# Altium PCB CW6680E LQFP48 BT Boombox S10 V1.0.PcbDoc (part 1 of 2)
Units mil, origin at the board's own origin, x right, y up, seen from the top; angles counter-clockwise.
Board outline 2057.09 x 1663.06 mil, 2 copper layers (Top Layer, Bottom Layer); 63 components, 61 nets, 239 pads, 208 vias.
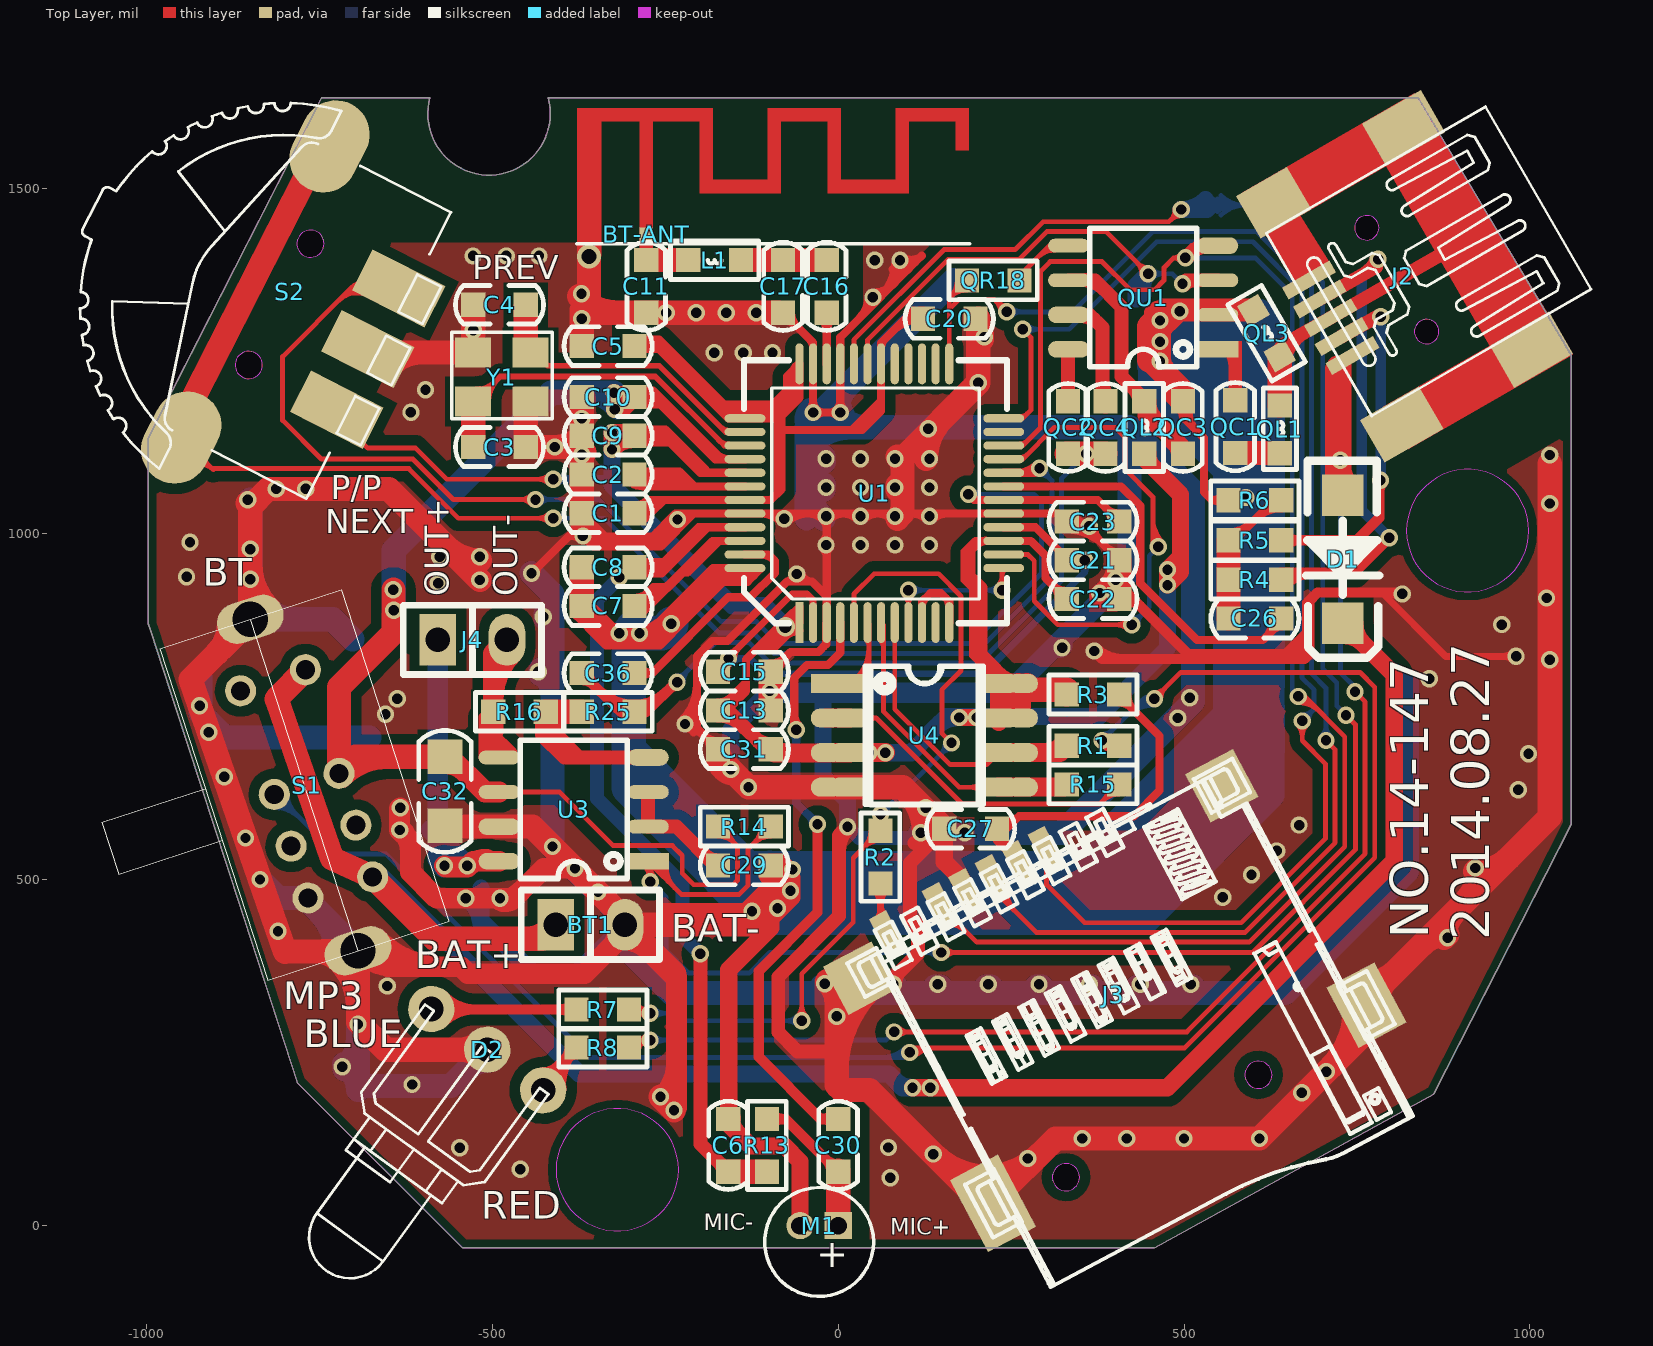
[diagram p0: Top Layer view]
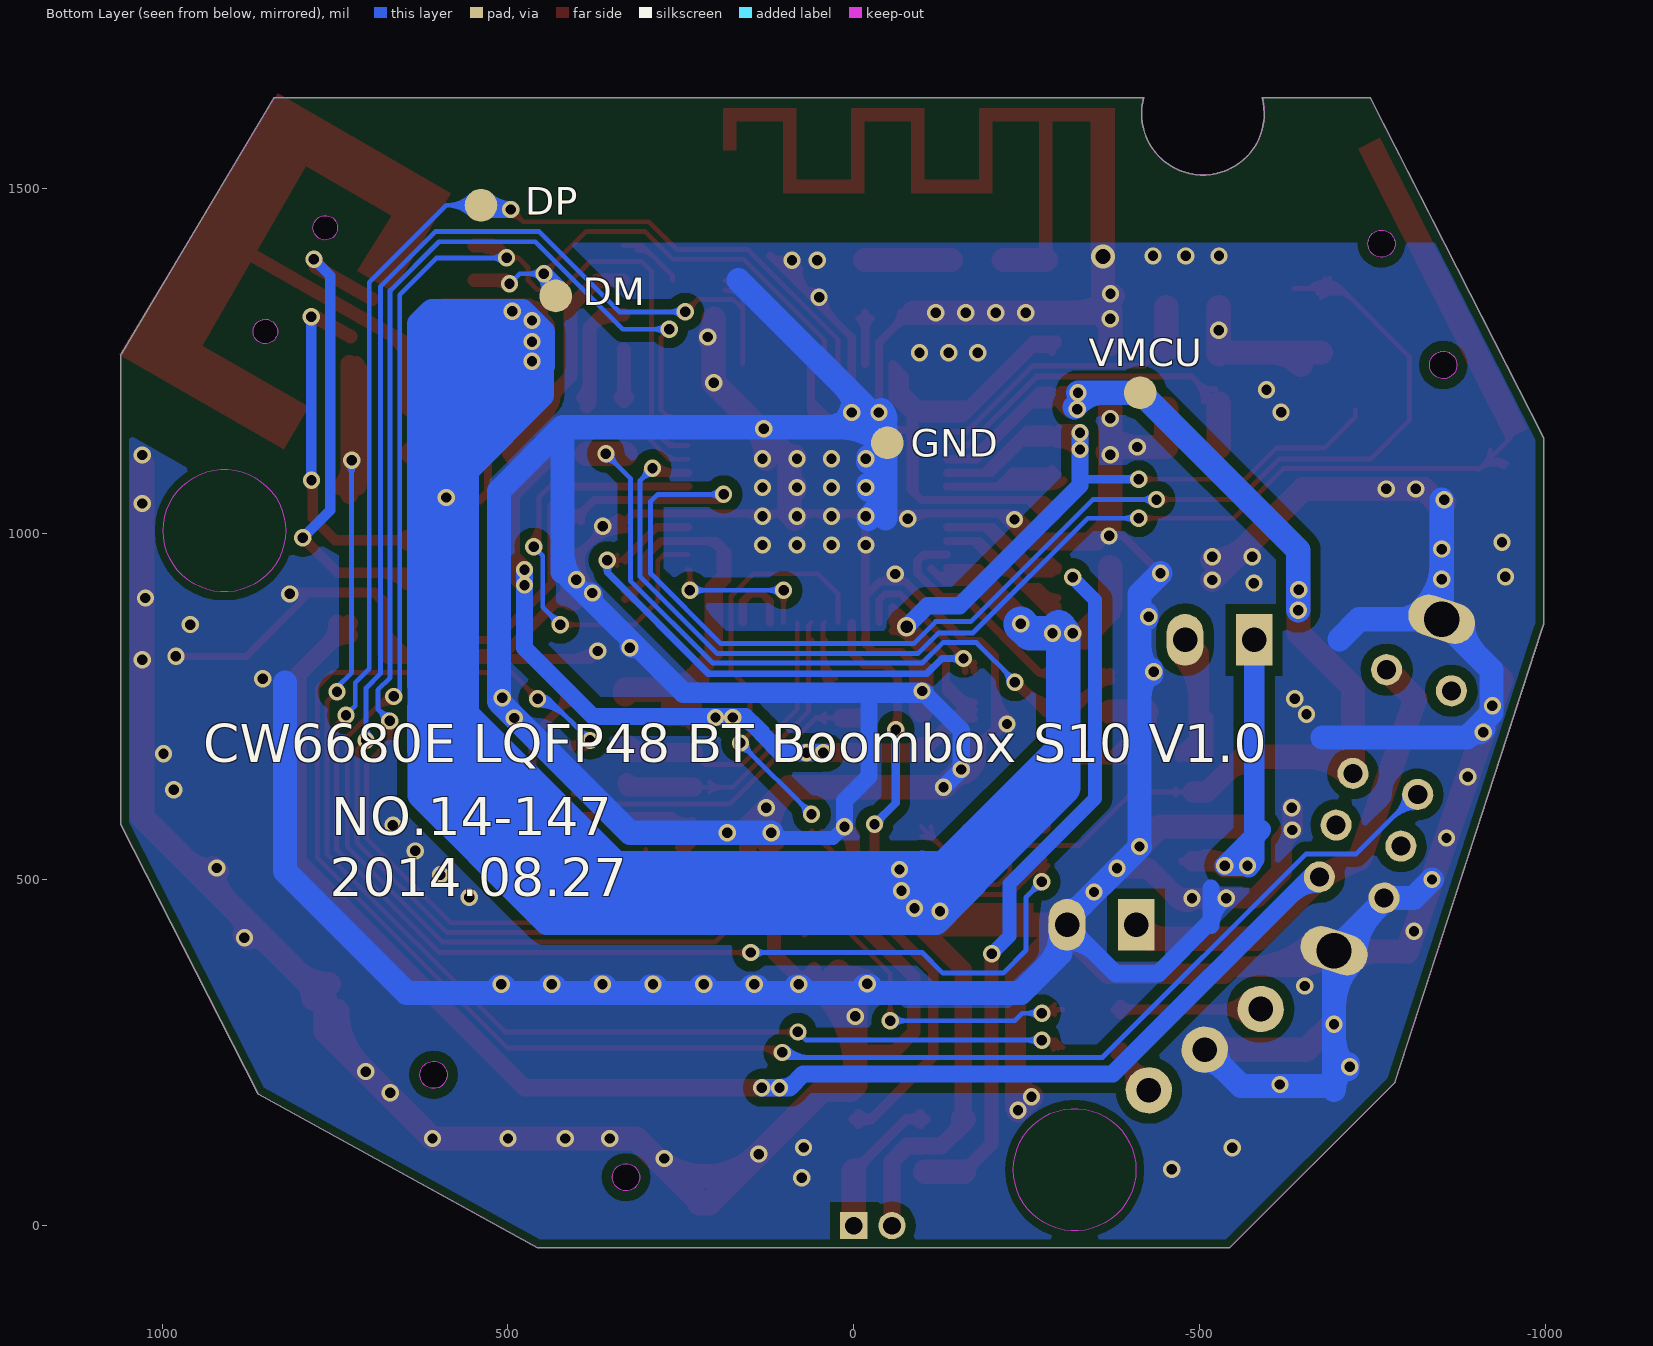
[diagram p1: Bottom Layer view, seen from below]

## Layer stack, top to bottom
Top Layer: signal copper 1.4
Dielectric: dielectric 12.6, FR-4, Dk 4.8
Bottom Layer: signal copper 1.4

## Board outline
-993.87,859.45 -997.24,869.84 -997.24,1138.86 -747.64,1628.74 -746.61,1630.77 -590.2,1630.77 -590.15,1630.76 ccw(c-504.74,1607.27) -419.33,1630.76 -419.3,1630.77 838.19,1630.77 838.18,1630.76 1059.84,1258.66 1059.84,579.96 861.25,190.19 457.09,-32.28 -543.08,-32.28 -781.65,206.29

## Design rules (kind name [scope] priority, off if disabled: settings)
Clearance Clearance_2 [(InLayerClass('Signal Layers')) vs OnLayer('Keep-Out Layer')] p1: gap=11.81
Clearance Clearance_1 [InPolygon] p2: gap=15
Clearance [All] p3: gap=7
ComponentClearance [All] p1 off: gap=10 collisioncheckmode=3 verticalgap=10 showdistances=FALSE
FanoutControl Fanout_BGA [IsBGA] p1 off: bgadir=Out bgaviamode=Centered fanoutstyle=Auto fanoutdirection=Alternating viagrid=1 // Fanout_BGA (Default Rule)
FanoutControl Fanout_LCC [IsLCC] p2 off: bgadir=Out bgaviamode=Centered fanoutstyle=Auto fanoutdirection=Alternating viagrid=1 // Fanout_LCC (Default Rule)
FanoutControl Fanout_SOIC [IsSOIC] p3 off: bgadir=Out bgaviamode=Centered fanoutstyle=Auto fanoutdirection=Alternating viagrid=1 // Fanout_SOIC (Default Rule)
FanoutControl Fanout_Small [(CompPinCount < 5)] p4 off: bgadir=Out bgaviamode=Centered fanoutstyle=Auto fanoutdirection=OutThenIn viagrid=1 // Fanout_Small (Default Rule)
FanoutControl Fanout_Default [All] p5 off: bgadir=Out bgaviamode=Centered fanoutstyle=Auto fanoutdirection=Alternating viagrid=1 // Fanout_Default (Default Rule)
Height [All] p1 off: minheight=0 maxheight=1000 prefheight=500
HoleSize [All] p1 off: absolutevalues=TRUE maxlimit=100 minlimit=1 maxpercent=80.000 minpercent=20.000
HoleToHoleClearance [All] p1 off: gap=10 allowstackedmicrovias=TRUE
LayerPairs [All] p1 off: enforce=TRUE
MinimumSolderMaskSliver [All] p1 off: minsoldermaskwidth=10
MinimumSolderMaskSliver SilkscreenOverComponentPads [All] p2 off: minsoldermaskwidth=10
NetAntennae [All] p1 off: netantennaetolerance=0
PlaneClearance [All] p1 off: clearance=20
PlaneConnect [All] p1 off: planeconnectstyle=Relief reliefexpansion=20 reliefentries=4 reliefconductorwidth=10 reliefairgap=10
PolygonConnect [All] p1: connectstyle=Direct reliefconductorwidth=10 reliefentries=4 polygonreliefangle="90 Angle"
RoutingVias [All] p1: holewidth=15 width=25 viastyle="Through Hole" minholewidth=15 minwidth=25 maxholewidth=18 maxwidth=28
SilkToSilkClearance [All] p1 off: silktosilkclearance=10
SilkscreenOverComponentPads SilkToSolderMaskClearance [IsPad] p1 off: minsilkscreentomaskgap=10
SolderMaskExpansion [All] p1: expansion=4
TestPointUsage FabricationTestPointUsage [All] p1 off: valid=0 allowmultiple=FALSE
Testpoint FabricationTestpoint [All] p1 off: side=3 testpointundercomponent=TRUE minsize=40 maxsize=100 preferedsize=60 minholesize=0 maxholesize=40 preferedholesize=32 testpointgrid=1 style=297 order=0123456789
Width [All] p1: maxlimit=70 minlimit=7 preferedwidth=11.81
8 further rules are at their usual default settings.

## Components (designator, comment, footprint, x,y, rotation, side; value= is the part's Value field where it differs from the comment)
BT1 "排针" SIP2 -408.2,434.9 r0 top (schematic designator BAT1)
BT-ANT "" IFA -277.44,1432.93 r0 top locked (schematic designator ANT4)
C1 "2.2uF" C0603 -332.6,1029.79 r180 top
C2 "104" C0603 -332.6,1085.79 r180 top
C3 "10pF" C0603 -489.6,1125.59 r180 top
C4 "10pF" C0603 -489.6,1331.19 r0 top
C5 "105" C0603 -332.6,1271.49 r0 top
C6 "NC" C0603 -159,116 r90 top
C7 "105" C0603 -332.6,895.79 r0 top
C8 "2.2uF" C0603 -332.6,951.79 r0 top
C9 "105" C0603 -332.6,1141.79 r0 top
C10 "105" C0603 -332.6,1197.79 r0 top
C11 "NC" C0603 -277.44,1357.79 r270 top
C13 "2.2uF" C0603 -135.6,744.79 r180 top
C15 "105" C0603 -135.6,800.79 r180 top
C16 "0R" C0603 -16.6,1357.79 r270 top
C17 "NC" C0603 -79.6,1357.79 r270 top
C20 "105" C0603 160.57,1310.9 r0 top
C21 "105" C0603 368.4,961.79 r0 top
C22 "105" C0603 368.4,905.79 r0 top
C23 "105" C0603 368.4,1017.79 r180 top
C26 "104" C0603 602.4,877.69 r180 top
C27 "NC" C0603 191.4,573.79 r180 top
C29 "105" C0603 -135.6,520.79 r0 top
C30 "104" C0603 0,116 r270 top
C31 "NC/104" C0603 -135.6,688.79 r0 top
C32 "10uF" C0805 -568.4,627.79 r90 top
C36 "104" C0603 -332.6,798.79 r180 top
D1 "4148" DO-214 729.4,1055.79 r270 top
D2 "DLED" LED-R&B -507.32,254.37 r144 top locked (schematic designator D3)
J2 "MINI USB" MINI-USB-B 807.48,1367.52 r120 top locked (schematic designator J1)
J3 "TF3" TFCARD 403.54,275.59 r28 top locked (schematic designator TF1)
J4 "排针" SIP2 -578.8,846.8 r0 top (schematic designator BAT1)
L1 "0R" L0603#1 -178.6,1395.79 r180 top
M1 "MIC" MIC-4022 0,0 r90 top locked (schematic designator MIC1)
QC1 "102" C0603 574.1,1155.1 r270 top
QC2 "104" C0603 332.4,1153.79 r90 top
QC3 "105" C0603 498.4,1153.79 r90 top
QC4 "NC" C0603 386.4,1153.79 r90 top
QL1 "220nH/470nH" L0603#2 638.4,1151.66 r270 top
QL2 "600R@100MHz" L0603#1 442.4,1153.79 r270 top
QL3 "600R@100MHz" L0603#1 619.4,1290 r300 top
QR18 "3.3K" R0603 224.1,1366.4 r180 top (schematic designator R1)
QU1 "RTC6218/QN8065" SO-8 548.4,1266.69 r180 top locked
R1 "2K" R0603 368.4,693.79 r0 top
R2 "3K" R0603 61.1,532.7 r270 top
R3 "4.7R" R0603 368.4,767.79 r180 top
R4 "0R/4.7K" R0603 602.4,933.69 r0 top
R5 "0R/4.7K" R0603 602.4,990.69 r0 top
R6 "NC/4.7K" R0603 602.4,1048.69 r180 top
R7 "470R" R0603 -340.3,312.39 r0 top
R8 "2K" R0603 -340.3,257.39 r0 top
R13 "6.8K" R0603 -103,116 r90 top
R14 "NC" R0603 -135.6,576.79 r180 top
R15 "200R" R0603 368.4,637.79 r180 top
R16 "30K" R0603 -460.8,742.79 r0 top
R25 "10K" R0603 -332.6,742.79 r0 top
S1 "SS-23D03" 3ND -846.59,611.2 r288 top locked
S2 "TS-003" K-TL-1305 -807.47,1331.85 r63 top locked
U1 "CW6680E LQFP48" LQFP48-7*7 58.95,1050.87 r90 top locked
U3 "LN4911" SO-8 -274.9,526.79 r180 top
U4 "4Mbits(512KByte)" SO-8/8W 124.67,708.79 r0 top locked
Y1 "26MHZ" 26m -528.6,1196.29 r0 top

## Footprints (in the part's own frame and the unit in brackets; to place one, negate y for a bottom-side part, rotate by r counter-clockwise, add the part's x,y. Pads: shape width x height; smd on the part's side, far side on the other; paste and mask are expansions set on the pad)
3ND [mil]
  round 45 hole 27.56: 1(-159.38,132.05) 2(-159.38,33.62) 3(-1.9,132.05) 4(-1.9,33.62) 5(76.84,132.05) 6(76.84,33.62) 7(155.58,132.05) 8(155.58,33.62)
  oval 59.06x98.43 hole 51.18: 9(250.53,78.81) 10(-253.32,78.9)
  silkscreen extent -253,-216 251,217
26m [mil]
  rect 52x43.31 smd: 1(1,-5) 2(84,-5) 3(84,66) 4(1,66)
  silkscreen extent -30,-30 115,95
C0603 [mil]
  rect 35x35 smd: 1(-38,0) 2(38,0)
  silkscreen extent -64,-28 64,28
C0805 [mil]
  rect 50x50 smd: 1(-50,0) 2(50,0)
  silkscreen extent -88,-38 88,38
DO-214 [mil]
  rect 60x60 smd: 1(0,0) 2(185,0)
  silkscreen extent -50,-53 235,53
IFA [mm]
  rect 0.5x0.5 smd: 1(0,0)
  Top Layer region: 2.45,4.15 1.95,4.15 1.95,1.51 2.45,1.51
  Top Layer region: 11.35,3.077 11.85,3.077 11.85,4.15 11.35,4.15
  Top Layer region: 9.15,4.15 11.85,4.15 11.85,4.65 9.15,4.65
  Top Layer region: 9.15,1.51 9.65,1.51 9.65,4.15 9.15,4.15
  Top Layer region: 6.67,1.511 9.153,1.511 9.153,2.011 6.67,2.011
  Top Layer region: 6.65,1.51 7.15,1.51 7.15,4.15 6.65,4.15
  Top Layer region: 4.45,4.15 7.15,4.15 7.15,4.65 4.45,4.65
  Top Layer region: 4.95,4.15 4.45,4.15 4.45,1.51 4.95,1.51
  Top Layer region: 2.45,1.51 4.45,1.51 4.45,2.01 2.45,2.01
  Top Layer region: -0.25,4.15 -0.25,-0.25 0.25,-0.25 0.25,4.15
  Top Layer region: -2.55,4.15 2.45,4.15 2.45,4.65 -2.55,4.65
  Top Layer region: -2.55,-0.809 -1.65,-0.809 -1.65,4.15 -2.55,4.15
  silkscreen extent -2.55,-0.34 11.88,-0.34
K-TL-1305 [mm]
  rect 1.7x3 smd: 1(-2.494,-3.627) 2(0.006,-3.627) 3(2.506,-3.627)
  oval 3.5x2.5 smd: 4(-6,1) 4(6,1)
  round 1 hole 1: 5(2.5,0) 6(-2.5,0)
  Keep-Out Layer circle w0.01: c2.5,0 r0.5
  Keep-Out Layer circle w0.01: c-2.5,0 r0.5
  silkscreen extent -7.38,-5 7.35,7.7
L0603#1 [mil]
  rect 35x35 smd: 1(-38,0) 2(38,0)
  silkscreen extent -64,-28 64,28
L0603#2 [mil]
  rect 35x35 smd: 1(-34,0) 2(35,0)
  silkscreen extent -59,-24 58,24
LED-R&B [mm] "双色灯"
  round 1.7 hole 0.9: 1(2.54,0) 2(0,0) 3(-2.54,0)
  silkscreen extent -2.78,0 2.82,10.04
LQFP48-7*7 [mm]
  rect 1.5x0.3 smd: 1(-4.549,2.919)
  oval 1.5x0.3 smd: 2(-4.549,2.419) 3(-4.549,1.919) 4(-4.549,1.419) 5(-4.549,0.919) 6(-4.549,0.419) 7(-4.549,-0.081) 8(-4.549,-0.581) 9(-4.549,-1.081) 10(-4.549,-1.581) 11(-4.549,-2.081) 12(-4.549,-2.581) 25(4.951,-2.581) 26(4.951,-2.081) 27(4.951,-1.581) 28(4.951,-1.081) 29(4.951,-0.581) 30(4.951,-0.081) 31(4.951,0.419) 32(4.951,0.919) 33(4.951,1.419) 34(4.951,1.919) 35(4.951,2.419) 36(4.951,2.919)
  oval 0.3x1.5 smd: 13(-2.549,-4.581) 14(-2.049,-4.581) 15(-1.549,-4.581) 16(-1.049,-4.581) 17(-0.549,-4.581) 18(-0.049,-4.581) 19(0.451,-4.581) 20(0.951,-4.581) 21(1.451,-4.581) 22(1.951,-4.581) 23(2.451,-4.581) 24(2.951,-4.581) 37(2.951,4.919) 38(2.451,4.919) 39(1.951,4.919) 40(1.451,4.919) 41(0.951,4.919) 42(0.451,4.919) 43(-0.049,4.919) 44(-0.549,4.919) 45(-1.049,4.919) 46(-1.549,4.919) 47(-2.049,4.919) 48(-2.549,4.919)
  silkscreen extent -4.57,-4.7 5.08,4.95
MIC-4022 [mm]
  rect 1x1 hole 0.65: 1(0,0)
  round 1 hole 0.65: 2(0,1.4)
  silkscreen extent -2.6,-1.3 1.4,2.7
MINI-USB-B [mm]
  rect 1.8x2.5 smd: 0(-4.7,-3) 0(-4.7,2.5) 0(4.7,-3)
  rect 1.8x2.159 smd: 0(4.7,2.5)
  rect 0.5x2 smd: 1(-1.6,2.8) 2(-0.8,2.8) 3(0,2.8) 4(0.8,2.8) 5(1.6,2.8)
  round 0.9 hole 0.9: ""(-2.2,0) ""(2.2,0)
  Keep-Out Layer circle w0.01: c-2.2,0 r0.45
  Keep-Out Layer circle w0.01: c2.2,0 r0.45
  silkscreen extent -3.87,-6 3.88,3.3
R0603 [mil]
  rect 35x35 smd: 1(-38,0) 2(38,0)
  silkscreen extent -64,-28 64,28
SIP2 [mm]
  rect 1.346x1.9 hole 0.9: 1(0,0)
  oval 1.346x1.9 hole 0.9: 2(2.54,0)
  silkscreen extent -1.27,-1.27 3.81,1.27
SO-8 [mil]
  rect 60x24 smd: 1(0,0)
  oval 60x20 smd: 2(0,-50) 3(0,-100) 5(215,-150) 6(215,-100)
  oval 60x24 smd: 4(0,-150) 7(215,-50) 8(215,0)
  silkscreen extent 30,-175 185,25
SO-8/8W [mil]
  rect 45x27.56 smd: 1(-141.73,75)
  rect 60x27.56 smd: 1(-107.5,75)
  oval 45x27.56 smd: 2(-141.73,25) 3(-141.73,-25) 4(-141.73,-75) 5(141.73,-75) 6(141.73,-25) 7(141.73,25) 8(141.73,75)
  oval 60x27.56 smd: 2(-107.5,25) 3(-107.5,-25) 4(-107.5,-75) 5(107.5,-75) 6(107.5,-25) 7(107.5,25) 8(107.5,75)
  silkscreen extent -85,-100 85,100
TFCARD [mm]
  rect 0.71x1.6 on Top Overlay: 1(3.092,7.239) 2(1.992,7.239) 8(-4.608,7.239)
  rect 0.71x1.6 smd: 3(0.892,7.239) 4(-0.208,7.239) 5(-1.308,7.239) 6(-2.408,7.239) 7(-3.508,7.239) 9(-5.708,7.239)
  rect 2x2 smd: 10(-7.366,6.281) 10(7.687,6.282)
  rect 2x3 smd: 10(-6.932,-3.321)
  rect 2x2.5 smd: 10(8.594,-3.325)
  round 1 hole 1: 14(-4.117,-3.726) 15(3.889,-3.726)
  Keep-Out Layer circle w0.01: c-4.117,-3.726 r0.5
  Keep-Out Layer circle w0.01: c3.889,-3.726 r0.5
  silkscreen extent -7.52,-7.73 9.19,7.58

## Part data
BT1 J4: library part BATTERY, "Battery"
BT-ANT: library part ANT
C1 C2 C3 C4 C5 C6 C7 C8 C9 C10 C13 C15 C20 C21 C22 C23 C26 C27 C29 C30 C31 C32 C36 QC1 QC2 QC3 QC4: library part CAP, "Capacitor"
C11 C17: library part CAP_C, "0402 CER CAP NCpF 50V +/-10%"
C16: library part CAP_C, "0402 CER CAP ?pF 50V +/-10%"
D1: library part DIODE, "Diode"
D2: "双色灯 插件 共阴"
J2: library part CON5, "Micro USB"
J3: library part TF, "TF卡座"
L1: library part INDUCTOR, "0 OHM"
M1: library part "HEADER 2", "咪头"
QL1 QL2 QL3: library part INDUCTOR
QR18 R1 R2 R3 R4 R5 R6 R7 R8 R13 R14 R15 R16 R25: library part RES2
QU1: library part QN8075
S1: library part SW-DPST
S2: library part K-TL-1305, "拨轮按键"
U1: library part BT8202
U3: library part 4871
U4: library part "SPI FLASH"

## Free pads (board coordinates)
  round 47.24 smd far side: 0(-414,1204) 0(-48.5,1131.53) 0(431,1344) 0(539,1475)

## Via types
v1: diameter 25, hole 15, Top Layer to Bottom Layer, 206 vias
v2: diameter 28, hole 18, Top Layer to Bottom Layer, 1 vias
v3: diameter 35, hole 22, Top Layer to Bottom Layer, 1 vias

## Nets (pads, with @x,y where several pads share a name; then routed paths per layer and width w, separated by ;. In a path a pad name is that pad's centre, name@x,y a point inside that pad or via, vN(x,y) a via of type N, cw(c..) or ccw(c..) an arc to the next point about the centre after c; other vN are vias at no path point)
ADKEY: S2.4 U1.20 | length 1887.5
  Top Layer w7: S2.4@-949.79,1139.25 -904.84,1094.3 -620.6,1094.3 -549,1022.7 v1(-412.1,1022.7) ; S2.4@-944.4,1101.57 cw(c-928.52,1079.27) -909.17,1098.62 ; S2.4@-940.34,1095.87 cw(c-923.66,1072.43) -903.31,1092.77 ; S2.4@-920.01,1121.71 ccw(c-890.47,1121.71) -911.36,1100.82 ; v1@-418.46,1016.34 ccw(c-433.83,1000.97) -433.83,1022.7 ccw(c-433.83,1044.43) v1@-418.46,1029.06
  Top Layer w11.81: U1.20@239.31,1088.31 284.31,1088.31 v1(291,1095) ; U1.20@258.94,1088.31 ccw(c258.94,1127.06) v1@286.34,1099.66
  Bottom Layer w7: v1(-412.1,1022.7) -338.2,1022.7 -172.29,856.79 -122.67,856.79 -93.18,827.3 198.07,827.3 309,938.23 309,1077 v1(291,1095) ; v1@-405.74,1016.34 cw(c-390.37,1000.97) -390.37,1022.7 cw(c-390.37,1044.43) v1@-405.74,1029.06 ; v1@291,1086 cw(c291,1064.27) 306.36,1079.64 cw(c321.73,1095) v1@300,1095
AGND: C6.2 C7.1 C8.1 C29.2 M1.2 QC3.2 QL3.1 QU1.2 R6.2 U1.48 | length 19828.4
  Top Layer w11.81: C7.1@-378.6,891.6 -378.6,881.6 -345,848 ; C7.1@-370.81,895.79 ccw(c-344.31,895.79) -363.05,877.05 ; C7.1@-370.79,895.9 ccw(c-351.92,885.43) -367.18,870.18 ; C7.1@-370.6,895.79 -356.09,895.79 v1(-316.7,856.41) ; C7.1@-370.6,896.01 cw(c-370.6,861.5) -346.2,885.9 ; C7.1@-360.46,890.17 ccw(c-337.67,877.53) -356.1,859.1 ; C7.1@-356.14,879.34 ccw(c-316.7,918.78) -316.7,863 cw(c-316.7,878.92) -327.96,867.66 cw(c-339.22,856.41) v1@-323.29,856.41 ; -354.22,877.41 ccw(c-370.6,861.04) -370.6,884.2 cw(c-370.6,821.18) -326.03,865.74 ; -349.39,872.59 cw(c-326.18,895.79) -359,895.79 ccw(c-303.98,895.79) -342.89,856.89 ; -346.37,860.37 -345.41,859.41 -260.59,859.41 ; -343.4,866.6 -342.19,865.39 ; -339.86,859.41 cw(c-339.86,833.24) v1@-321.36,851.74 ; -335.98,859.17 ccw(c-316.7,878.45) v1@-316.7,851.19 ; -328.74,844.37 ccw(c-315.3,857.8) -315.3,838.8 ; v1@-324.81,865.39 cw(c-324.81,818.8) v1@-291.86,851.74 ; v1@-323.23,857.34 cw(c-334,858.88) -334,848 ; v1@-322.57,853.4 ccw(c-342.19,843.34) -342.19,865.39 ; v1@-322.16,860.11 cw(c-345,875.6) -345,848 ; v1@-320.39,852.72 ccw(c-286.79,886.32) -286.79,838.8 ; v1@-320.39,860.09 cw(c-307.61,847.31) -307.61,865.39 ; -312.08,838.8 ccw(c-312.08,875.19) v1@-283.04,853.26 ; v1@-310.34,858.16 ccw(c-297,861.84) -297,848 ; v1@-310.36,859.41 cw(c-310.36,833.24) v1@-291.86,851.74 ; -296.29,865.39 cw(c-296.29,847.31) v1@-283.51,860.09 ; -295.1,841.32 ccw(c-287.42,855.98) -275.72,844.28 ; -294.99,841.26 ccw(c-287.85,855.14) -276.82,844.11 ; v1@-293.55,858.19 cw(c-307,861.97) -307,848 ; v1@-293.54,859.41 ccw(c-293.54,833.24) v1@-312.04,851.74 ; v1@-292.46,860.38 cw(c-335.8,893.1) -335.8,838.8 ; v1@-292.32,855.39 ccw(c-272.11,859.4) -272.11,838.8 ; v1@-291.86,861.07 cw(c-303.12,872.33) -303.12,856.41 cw(c-303.12,840.48) v1@-291.86,851.74 ; v1@-289.59,851.77 ccw(c-280.08,870.25) -265.38,855.55 ; v1@-289.62,851.78 ccw(c-279.61,870.89) -264.36,855.64 ; -288.36,838.8 ccw(c-288.36,857.28) -273.61,846.14 ; v1@-287.2,863 ccw(c-287.2,908.41) -255.09,876.3 ; v1@-284.18,862.27 ccw(c-272.3,885.37) -253.93,867 ; v1@-284.14,862.25 ccw(c-271.8,885.8) v1@-253,867 ; v1@-282.54,861.07 ccw(c-271.28,872.33) -271.28,856.41 ccw(c-271.28,840.48) -282.54,851.74 cw(c-264.04,833.24) -264.04,859.41 ; v1@-280.91,854.44 cw(c-266,849.77) -266,865.39 ; v1@-280.73,857.69 ccw(c-257.72,862.26) -257.72,838.8 ; v1@-279.1,865.39 ccw(c-279.1,818.8) v1@-312.04,851.74 ; -267.2,838.8 -267.2,843.32 v1@-234.58,875.94 ; -258.28,838.8 cw(c-258.28,914.83) -312.04,861.07 ccw(c-300.78,872.33) -300.78,856.41 ccw(c-300.78,840.48) v1@-312.04,851.74 ; -249,882.39 -266,865.39 ; v1@-244.06,875.94 v1@-234.58,875.94 ; -236,884 -169.48,950.52 U1.48@-134.71,950.52 ; -232.46,898.93 -232.46,887.54 v1@-253,867 ; -177.37,942.63 cw(c-158.33,923.59) U1.48@-158.33,950.52 ; -175.06,944.94 cw(c-161.12,931) U1.48@-158.33,950.52 ; -172.15,931.37 -171.58,930.8 -130.8,930.8 -122.09,939.51 ; -167.05,929.47 ccw(c-188.09,950.52) U1.48@-158.33,950.52 ; -162.1,941.42 ccw(c-171.19,950.52) U1.48@-158.33,950.52 ; U1.48@-146.88,949.63 ccw(c-147.77,950.52) U1.48@-146.52,950.52 ; U1.48@-111.9,949.7 -122.09,939.51 ; QC3.2@492.64,1181.73 cw(c486.95,1171.79) 498.4,1171.79 ; QC3.2@498.2,1191.87 ccw(c523.76,1182.29) 504.46,1162.99 ; QC3.2@498.4,1183.79 498.4,1171.79 ; QC3.2@498.4,1191.79 498.4,1169.04 ; QC3.2@504.16,1181.73 ccw(c509.85,1171.79) 498.4,1171.79 ; QC3.2@509.26,1187.72 ccw(c542.64,1175.22) 517.43,1150.01 ; R6.2@555.27,1041.55 ccw(c540.61,1030.07) 540.61,1048.69 ; R6.2@555.27,1055.84 cw(c540.61,1067.31) 540.61,1048.69 ; R6.2@564.4,1048.69 540.61,1048.69 ; -345,848 -307,848 ; -345,848 -335.8,838.8 ; -342.19,865.39 -266,865.39 ; -335.8,838.8 -257.72,838.8 ; -334,848 -370.6,884.6 -370.6,893.79 -333.21,856.41 v1@-274.98,856.41 ; -334,848 -307,848 ; -307,848 -297,848 ; -297,848 -277.93,848 ; -277.93,848 -266.52,859.41 ; -277.93,848 -272.93,848 -253.93,867 ; -277.93,848 -272,848 v1@-253,867 ; v1@-274.98,856.41 -180.87,950.52 U1.48@-134.71,950.52 ; v1@-274.98,856.41 -269.52,856.41 -266.52,859.41 ; -266.52,859.41 -260.59,859.41 ; -260.59,859.41 v1@-253,867 ; -257.72,838.8 -220.58,875.94 ; -253.93,867 v1@-253,867 ; v1@-234.58,875.94 -160,950.52 U1.48@-134.71,950.52 ; v1@-234.58,875.94 -227.58,875.94 -153,950.52 U1.48@-134.71,950.52 ; v1@-234.58,875.94 -220.58,875.94 ; -220.58,875.94 -161.91,934.61 -157.01,939.51 ; -157.01,939.51 -122.09,939.51 ; -157.01,939.51 -146,950.52 U1.48@-134.71,950.52 ; 498.4,1169.04 cw(c514.92,1169.04) 505.22,1182.41 ccw(c514.92,1169.04) 498.4,1169.04 ; 498.4,1169.04 ccw(c481.88,1169.04) 491.59,1182.41 cw(c481.88,1169.04) 498.4,1169.04 ; 498.4,1169.04 528.81,1138.64 528.81,1060.49 540.61,1048.69
  Top Layer w20: 451.42,1297.74 cw(c461.21,1305.26) 452.48,1313.98 ; 452.38,1320.21 cw(c474.83,1299.69) 474.83,1330.1 ; 452.9,1265.69 ccw(c452.99,1265.69) 452.93,1265.63 ; 452.9,1272.43 cw(c501.27,1272.43) v1@467.07,1306.63 ; 452.9,1313.97 ccw(c501.27,1313.97) v1@467.07,1279.77 ; 452.9,1320.71 cw(c452.99,1320.71) 452.93,1320.77 ; 453.82,1271.08 cw(c432.13,1249.4) v1@462.8,1249.4 ; 459.05,1292.05 ccw(c463.5,1303.68) 472.3,1294.88 ; v1@464,1260.9 452.9,1272 452.9,1314.4 468.6,1330.1 ; v1@464,1286.58 v1@494.11,1316.69 ; v1@465.3,1310.9 ccw(c465.3,1353.16) v1@495.18,1323.28 ; v1@466.19,1310.74 ccw(c475.56,1335.24) v1@494.11,1316.69 ; v1@467.15,1306.71 cw(c520.2,1258.23) 520.2,1330.1 ; v1@467.28,1309.92 cw(c479.44,1319.26) 468.6,1330.1 ; v1@467.8,1278 cw(c497.69,1278) 476.56,1299.14 ; v1@467.8,1308.4 cw(c498.46,1308.4) 476.78,1330.08 ; 485.74,1308.32 ccw(c472.05,1322) v1@491.4,1322 ; v1@491.66,1320.89 ccw(c476.8,1313.5) 476.8,1330.1 ; v1@491.73,1323.24 cw(c464,1338.99) v1@464,1307.1 ; v1@492.12,1320.25 ccw(c468.6,1297.1) 468.6,1330.1 ; v1(493.9,1322) 493.9,1316.9 v1@494.11,1316.69 ; 509.07,1330.1 cw(c509.07,1329.53) 509.58,1329.79 ; 564.93,1330.1 cw(c564.93,1287.44) QL3.1@595.1,1317.61 ; QU1.2@567.29,1316.69 ccw(c567.29,1356.02) QL3.1@595.1,1328.21 ; QU1.2@568.4,1316.69 cw(c593.21,1300.45) QL3.1@593.21,1330.1 ; QL3.1@603,1316.69 QU1.2@548.4,1316.69 ; QL3.1@603,1320.31 QL3.1@593.21,1330.1 ; v1@464,1307.1 479,1307.1 v1@502,1330.1 ; v1@464,1307.1 464,1317.3 476.8,1330.1 ; 468.6,1330.1 520.2,1330.1 ; 476.8,1330.1 520.2,1330.1 ; v1@494.11,1316.69 QU1.2@548.4,1316.69 ; v1@494.11,1316.69 QU1.2@548.4,1316.69 ; v1@495.67,1320.23 cw(c519.49,1296.41) 519.49,1330.1 ; v1@495.67,1320.23 cw(c519.49,1296.41) 519.49,1330.1 ; v1@495.67,1320.23 cw(c519.49,1296.41) 519.49,1330.1 ; v1@502,1330.1 cw(c502,1297.41) QU1.2@528.4,1316.69 ; v1@502,1330.1 520.2,1330.1 ; 520.2,1330.1 533.61,1316.69 QU1.2@548.4,1316.69 ; 520.2,1330.1 QL3.1@593.21,1330.1 ; QU1.2@528.4,1316.69 ccw(c496.03,1284.32) 496.03,1330.1 cw(c496.03,1284.32) QU1.2@528.4,1316.69 ; v1@495.67,1323.77 ccw(c512.75,1340.85) 512.75,1316.69 cw(c512.75,1340.85) v1@495.67,1323.77
  Top Layer w25: C6.2@-159,154 -159,147.42 -126.58,115 -77.42,115 -55.12,92.7 M1.2@-55.12,0 ; C6.2@-158,155 -158,370 -97.6,430.4 C29.2@-97.6,507.89 ; C6.2@-154,154 ccw(c-126.05,154) -145.81,134.24 ; -97.6,444 -66.8,474.8 v1@-66.8,490 ; C29.2@-97.6,520.79 v1@-66.8,490 ; C29.2@-84.69,520.79 -66.8,502.9 v1@-66.8,490
  Top Layer w35: C7.1@-370.6,893.79 -370.6,934 C8.1@-370.6,951.79 ; C6.2@-159,154 C6.2@-158,155 ; C29.2@-97.6,507.89 C29.2@-84.69,520.79 ; C29.2@-97.6,520.79 C29.2@-84.69,520.79 ; v1@-73.3,509.4 C29.2@-84.69,520.79 ; 449.14,1251.07 cw(c492.23,1251.07) v1@461.76,1281.54 ; 449.14,1276.33 ccw(c492.23,1276.33) v1@461.76,1245.86 ; 449.14,1281.47 cw(c492.23,1281.47) v1@461.76,1311.94 ; v1@460.34,1278.62 ccw(c524.14,1270.64) 478.67,1225.17 ; v1@460.97,1275.5 cw(c484.57,1289.13) v1(465.3,1308.4) v1@464,1307.1 ; v1@461.2,1275.13 cw(c481.65,1289.45) v1@464,1307.1 ; v1@461.32,1274.97 cw(c485.45,1293.35) 464,1314.8 449.14,1299.94 ; v1@462.35,1273.96 cw(c481.3,1299.94) 449.14,1299.94 ; v1@464,1260.9 v1@464,1271 ; 449.14,1299.94 449.14,1254.7 498.4,1205.44 QC3.2@498.4,1191.79 ; v1@464,1307.1 464,1239.84 484.4,1219.44 ; 484.4,1219.44 ccw(c518.7,1219.44) QC3.2@498.4,1191.79 ; 484.4,1219.44 484.4,1205.79 QC3.2@498.4,1191.79 ; 488.75,1215.09 cw(c465.45,1191.79) QC3.2@498.4,1191.79 ; 488.75,1215.09 cw(c465.45,1191.79) QC3.2@498.4,1191.79 ; 488.75,1215.09 cw(c465.45,1191.79) QC3.2@498.4,1191.79 ; QC3.2@498.4,1191.79 493.9,1196.29 QC3.2@498.4,1191.79
  Bottom Layer w11.81: v1@-291.86,851.74 cw(c-310.85,832.76) -284,832.76 ; v1@-284,847.39 -284,643 -125,484 -99,484 ; -103.66,479.34 ccw(c-114.92,468.08) -114.92,484 ccw(c-114.92,499.92) -103.66,488.66
  Bottom Layer w35: -303,633 -107.79,437.79 ; -176.1,494.69 -140.31,458.9 ; -154,484 -107.79,437.79 ; -151.17,469.26 -119.7,437.79 ; -149.48,479.48 ccw(c-87.73,541.23) v1@-87.73,453.9 ; -144,524.2 -99,524.2 -98.8,524 401.6,524 406.4,528.8 ; -133.41,463.41 ccw(c-102.88,493.95) v1@-85.74,454.31 ; v1@-117.53,458.9 ccw(c-117.53,532.53) v1@-65.46,480.46 ; -102.54,480.46 ccw(c-50.47,532.53) -50.47,458.9 ; -102.54,487.54 cw(c-63.15,448.15) v1@-63.15,503.85 ; -99,484 -25,484 ; -99,511.7 -91.15,503.85 ; -99,525 -58,484 -25,484 ; -95.07,480.91 cw(c-140.31,516.39) -140.31,458.9 ; v1@-91.26,462.44 cw(c-39.2,410.37) -39.2,484 ; -87.6,513.6 ccw(c-73.65,527.55) v1@-63.54,510.61 ; v1@-83.71,455.92 cw(c-119.7,482.58) -119.7,437.79 ; v1@-82.84,457.82 cw(c-107.79,463.35) -107.79,437.79 ; -80.71,503.85 ccw(c-80.71,529.51) v1@-62.56,511.36 ; -76,524 cw(c-76,505) v1@-62.56,518.44 ; v1@-72.54,480.46 ccw(c-20.47,532.53) -20.47,458.9 ; v1@-72.54,487.54 cw(c-33.15,448.15) -33.15,503.85 ; v1@-69.64,511.36 ccw(c-51.49,529.51) -51.49,503.85 ; v1@-69.64,518.44 cw(c-56.2,505) -56.2,524 ; v1@-64.37,485.9 ccw(c-91.15,474.91) -91.15,503.85 ; 270.3,458.9 278.5,458.9 559,739.4 ; 320.5,484 328.4,484 348.25,503.85 ; 362.9,484 362.9,485.3 383.6,506 406.4,528.8 ; 449.2,1251.2 cw(c492.1,1251.2) v1@461.76,1281.54 ; 449.2,1276.2 ccw(c492.1,1276.2) 461.76,1245.86 cw(c488.48,1272.58) 450.7,1272.58 ; 450.7,1226.22 cw(c488.48,1226.22) v1@461.76,1252.94 ; 450.7,1254.82 cw(c488.48,1254.82) v1@461.76,1281.54 ; v1@460.3,1278 cw(c521.62,1278) 478.26,1321.36 ; v1@460.9,1272.1 cw(c438.19,1249.4) v1@470.3,1249.4 ; v1@460.97,1275.5 cw(c484.57,1289.13) v1(465.3,1308.4) ; v1@461.69,1304.94 ccw(c492,1333.96) 492,1292 ; v1@464.1,1249.4 464.1,1265.8 493.5,1295.2 493.5,1263.7 516.6,1240.6 ; v1@465.05,1288.05 ccw(c450.12,1302.99) v1@470.01,1310.08 ; v1@465.3,1254.4 cw(c465.3,1222.29) 488,1245 ; v1@465.3,1273 ccw(c465.3,1291.59) 478.44,1278.44 ; v1@469.21,1270.91 ccw(c490.72,1249.4) 460.3,1249.4 ccw(c503.03,1249.4) 472.82,1219.18 ; v1@473.14,1308.4 ccw(c473.14,1342.76) v1@497.44,1318.46 ; 478,1278 492,1292 ; 483.77,1285.47 ccw(c447.24,1322) v1@498.9,1322 ; 487.03,1292 ccw(c487.03,1256.27) v1@461.76,1281.54 ; 492,1248.39 ccw(c455.95,1248.39) 466.81,1282.77 cw(c455.35,1246.38) 493.5,1246.38 ; v1(493.9,1322) 571.1,1322 610,1322 628.2,1303.8 628.2,1231.2 ; v1@497.75,1318.81 cw(c475.6,1337.17) v1@475.6,1308.4 ; 559,955.1 559,1092.1 ; 559,1047 559,1225 492,1292 ; v1@586.86,1048.08 cw(c607.7,1092.1) 559,1092.1 ; 589.55,583.15 628,621.6 628,686.73 628.2,686.93 628.2,749.47 628,749.67 628,780.33 628.2,780.53 628.2,1231.2 ; v1@592.54,1049.06 ccw(c555.68,1085.92) 607.8,1085.92 ; v1@592.54,1056.14 cw(c555.68,1019.28) 607.8,1019.28 ; 596.4,1322 578,1322 ; 628.2,1215 628.2,1275.8 582,1322 578,1322 ; -140.31,458.9 426.7,458.9 ; -119.7,437.79 -15,437.79 ; -107.79,437.79 -15,437.79 ; -91.15,503.85 348.25,503.85 ; -25,484 404,484 447.5,527.5 559,639 559,681.4 ; -15,437.79 444.19,437.79 482,475.6 ; 348.25,503.85 584,739.6 ; 406.4,528.8 559,681.4 ; 426.7,458.9 584,616.2 584,739.6 ; 426.7,458.9 465.3,458.9 482,475.6 ; v1@455,1278 479.2,1278 516.6,1240.6 ; v1@455,1278 469,1292 492,1292 ; v1@455,1278 559,1174 559,1133 449.2,1242.8 449.2,1292.3 478.9,1322 ; v1@465.3,1283 cw(c465.3,1261.52) 480.49,1276.71 ; v1@465.3,1283 cw(c465.3,1261.52) 480.49,1276.71 ; v1@465.3,1283 cw(c465.3,1261.52) 480.49,1276.71 ; v1(465.3,1308.4) v1@475.6,1308.4 ; v1(465.3,1308.4) 450.7,1293.8 450.7,1200.4 559,1092.1 ; v1@475.6,1308.4 492,1292 ; v1@475.6,1308.4 478.9,1311.7 478.9,1322 ; 478.9,1322 494.2,1322 533,1283.2 ; 478.9,1322 516.1,1322 ; 482,475.6 607.8,601.4 607.8,1208.4 559,1257.2 ; 492,1292 492,1265.2 516.6,1240.6 ; 516.1,1322 578,1322 ; 516.1,1322 537.4,1322 615.75,1243.65 628.2,1231.2 ; 516.6,1240.6 559,1198.2 ; 533,1283.2 559,1257.2 ; 533,1283.2 584,1232.2 584,739.6 ; 559,681.4 559,739.4 ; 559,739.4 559,1198.2 ; 559,1198.2 559,1257.2 ; v1@-129.42,459.42 ccw(c-104.3,484.54) -85.01,454.7 cw(c-104.3,484.54) v1@-129.42,459.42 ; v1@-91.26,455.36 ccw(c-48.84,497.79) -48.84,437.79 cw(c-48.84,497.79) v1@-91.26,455.36 ; 559,992.24 cw(c649.36,992.24) 585.46,1056.14 ccw(c649.36,992.24) 559,992.24 ; 559,1112.96 ccw(c649.36,1112.96) 585.46,1049.06 cw(c649.36,1112.96) 559,1112.96
  Bottom Layer w50: -303,848.44 cw(c-279.23,848.44) -296.04,865.24 ; -303,856.41 -303,734 -303,699 ; v1(-287.2,856.41) -254.11,856.41 -241.51,869.01 v1(-241.51,869.91) ; -145,522 -107,484 ; -118.14,484 cw(c-118.14,428.48) v1@-78.89,467.74 ; -76.28,463.91 ccw(c-107,450.46) -107,484 ; -303,699 -303,633 -154,484 -107,484 ; -303,699 -303,688 -107,492 -107,484 ; -107,475.26 ccw(c-71.37,475.26) -96.56,450.06 cw(c-71.37,475.26) -107,475.26
  other v1: -124.55,454.55 -87.73,458.9 -69,484 -66.1,514.9 589,1052.6 465.3,1249.4 465.3,1278
ANT: J2.0 J2.3 J2.5 QL1.1 QL3.2 | length 430.1
  Top Layer w19.68: QL3.2@637.5,1259.66 641,1272.26 J2.3@712.01,1312.4 900.74,1420.45 ; QL3.2@645.78,1255.04 cw(c702.82,1239.2) 673.69,1290.74
  Top Layer w35: QL1.1@638.4,1185.66 QL3.2@638.4,1257.09
AUX: C26.1 U1.19 | length 641.9
  Top Layer w11.81: U1.19@239.31,1068.63 330.4,1068.63 ; 302.29,1068.63 330.4,1068.63 ; 617.22,849.72 ccw(c589.25,877.69) C26.1@628.81,877.69 ; C26.1@628.79,861.29 cw(c640.4,849.67) C26.1@640.4,866.1 ; C26.1@640.4,872.9 613.9,846.4 518.97,846.4 436.81,928.56 436.81,984.64 436.81,1040.64 408.82,1068.63 330.4,1068.63
BT3.3V: C9.2 C13.2 C22.1 C31.2 QL2.2 R3.2 S2.1 U1.1 U1.15 U1.41 U4.3 U4.7 U4.8 | length 7739
  Top Layer w7: S2.1@-724.81,1179.53 -724.81,1169.01 -679.9,1124.1 -610.8,1124.1 -565.7,1079 v1(-412,1079) ; U4.3@40.66,676.52 cw(c58.21,658.98) 58.21,683.79 cw(c58.21,708.61) U4.3@40.66,691.06 ; v1(44.4,683.8) 40.66,683.8 v1(68.31,683.79) ; v1@50.76,677.44 cw(c66.11,662.09) v1@66.11,683.79 ; v1@50.76,690.16 ccw(c66.15,705.55) v1@66.15,683.79 ; v1@61.94,677.43 ccw(c46.58,662.06) 46.58,683.79 ccw(c46.58,705.52) v1@61.94,690.16 ; 198.88,817.08 cw(c165.59,783.79) U4.8@212.67,783.79 ; 201.9,985.29 cw(c210.06,977.14) U1.15@214.71,987.69 ; 210.83,805.13 cw(c189.49,783.79) U4.8@219.67,783.79 ; U4.8@232.17,783.79 192.4,823.56 192.4,975.79 206.5,989.89 U1.15@239.31,989.89 ; -433.73,1079 cw(c-433.73,1057.27) -418.36,1072.64 ccw(c-433.73,1057.27) -433.73,1079 ; -433.73,1079 ccw(c-433.73,1100.73) -418.36,1085.36 cw(c-433.73,1100.73) -433.73,1079
  Top Layer w11.81: C9.2@-294.75,1141.64 ccw(c-271.5,1164.87) -271.5,1132 ; C9.2@-294.76,1141.93 cw(c-275.24,1125.45) -275.24,1151 ; C9.2@-286.4,1133.59 cw(c-266.61,1113.8) -266.61,1141.79 cw(c-266.61,1169.78) -286.4,1149.99 ccw(c-243,1193.33) -243,1132 ; C9.2@-285.74,1134.31 cw(c-249.81,1103.97) -249.81,1151 ; C13.2@-173.74,744.96 cw(c-163.8,732.95) -152.78,743.97 ; C13.2@-173.6,744.58 ccw(c-172.86,773.17) -152.64,752.94 ; C13.2@-173.6,745.01 cw(c-173.6,697.25) -139.82,731.02 ; C13.2@-173.6,756.39 ccw(c-173.6,784.38) -153.8,764.59 ccw(c-134.01,744.79) C13.2@-162,744.79 ; C13.2@-173.3,756.38 ccw(c-171.88,811.08) -133.19,772.39 ; C13.2@-166.21,735.86 cw(c-155.49,722.9) -143.6,734.79 ; C13.2@-163.54,739.03 cw(c-153.6,733.34) -153.6,744.79 ; C13.2@-163.54,750.55 ccw(c-153.6,756.24) -153.6,744.79 ; -141.69,719.98 ccw(c-173.6,688.07) -173.6,733.2 cw(c-173.6,656.92) -119.66,710.86 ; -139.42,717.71 ccw(c-97.6,759.53) -97.6,700.39 cw(c-97.6,728.38) -117.39,708.59 cw(c-137.18,688.79) C31.2@-109.19,688.79 ; -119.25,697.55 ccw(c-97.6,719.2) C31.2@-97.6,688.58 ; -115.93,835.71 -105.29,835.71 ; -106.48,845.16 cw(c-76.2,814.89) -76.2,857.71 ccw(c-76.2,840.58) -88.31,852.69 ; -90.73,850.27 ccw(c-106.25,865.8) v2@-84.29,865.8 ; -84.91,842.84 ccw(c-95.37,853.29) v2@-82.98,861.38 ; v2@-76.38,873.89 ccw(c-76.6,884.19) -66.3,884.19 ; v2(-76.2,865.8) -75.2,865.8 v2@-68,873 ; -76.13,851.61 cw(c-55.97,831.45) U1.1@-55.97,859.97 ; v2@-70.59,871.63 ccw(c-63.35,879.16) U1.1@-55.97,871.78 ; v2@-68.61,862.98 cw(c-55.97,858.29) U1.1@-55.97,871.78 ; v2@-68.29,864.07 cw(c-57.19,861.63) U1.1@-57.19,873 ; -66.3,880.99 ccw(c-57.14,880.99) U1.1@-57.88,871.85 ; 200,983.39 cw(c215.69,967.7) 215.69,989.89 ccw(c213.39,973.81) 201.9,985.29 ; 200.2,924.5 198.1,924.5 183.1,939.5 183.1,962.5 ; 200.4,915.7 200.4,915.8 183.1,933.1 183.1,962.5 ; 206.34,818.96 cw(c173.47,786.1) U4.8@219.88,783.58 ; 206.38,830.42 cw(c170.65,794.69) U4.8@219.78,782.87 ; 221.28,815.52 cw(c194.68,788.91) U4.8@231.26,780.11 ; 225.05,800.25 cw(c208.97,784.17) U4.8@231.68,782.94 ; U4.8@232.17,783.79 232.17,793.13 200.4,824.9 200.4,932.5 ; 236.19,800.61 cw(c218.71,783.13) U4.8@242.75,777.35 ; 236.26,800.54 ccw(c257.68,821.96) U4.8@257.68,791.67 ; U4.8@251.1,785.7 cw(c242.74,777.35) U4.8@254.23,774.59 ; U4.8@254.17,778.45 cw(c266.4,767.13) U4.8@266.4,783.79 ; U4.8@254.17,789.14 ccw(c266.4,800.45) U4.8@266.4,783.79 ; 269.85,989.89 U1.15@239.31,989.89 ; C22.1@318.81,905.79 ccw(c290.82,905.79) 310.61,925.59 ccw(c330.4,945.38) C22.1@330.4,917.39 ; C22.1@330.4,905.79 299.88,936.32 299.88,968.46 278.45,989.89 U1.15@239.31,989.89 ; QL2.2@442.4,1104.2 cw(c442.4,1076.21) 462.2,1096 cw(c481.99,1115.79) QL2.2@454,1115.79 ; QL2.2@442.4,1115.79 495,1063.2 495,945 v1(476,926) ; v1@476,932.59 ccw(c476,948.51) 487.26,937.26 ccw(c498.51,926) v1@482.59,926 ; C9.2@-294.6,1141.79 -284.8,1132 -243,1132 ; C9.2@-294.6,1141.79 -240.6,1141.79 -194.9,1096.1 ; C9.2@-294.6,1141.79 -285.39,1151 -249.8,1151 ; -249.8,1151 -194.9,1096.1 ; -243,1132 -199.31,1088.31 U1.41@-134.71,1088.31 -187.12,1088.31 -194.9,1096.1 ; C13.2@-173.6,744.79 -166.5,744.79 -110.5,688.79 C31.2@-97.6,688.79 -153.6,744.79 ; C13.2@-173.6,744.79 -160.79,744.79 -133.19,772.39 ; C13.2@-173.6,744.79 -133.19,785.2 -133.19,818.45 ; C13.2@-173.6,744.79 -153.6,744.79 ; -133.19,772.39 -133.19,818.45 ; -133.19,818.45 v2@-89.07,862.57 ; -105.29,835.71 -92.04,835.71 U1.1@-55.97,871.78 ; -105.29,835.71 v2@-68,873 ; v2@-89.07,862.57 -66.3,885.34 ; v2@-89.07,862.57 -79.86,871.78 U1.1@-55.97,871.78 ; v2@-68,873 -68,883.64 -66.3,885.34 ; v2@-68,873 U1.1@-57.19,873 ; -66.3,878.31 ccw(c-60.31,878.31) U1.1@-61.79,872.51 ; -66.3,878.31 ccw(c-60.31,878.31) U1.1@-61.79,872.51 ; -66.3,878.31 ccw(c-60.31,878.31) U1.1@-61.79,872.51 ; -66.3,882.11 -66.3,884.19 ; -66.3,882.11 -66.3,885.34 ; -66.3,882.11 U1.1@-57.19,873 ; -66.3,882.11 -66.3,885.34 ; -66.3,884.19 -55.97,894.52 U1.1@-55.97,871.78 ; -66.3,885.34 ccw(c-56.48,875.52) -68.94,869.38 cw(c-56.48,875.52) -66.3,885.34 ; -66.3,885.34 cw(c-77.81,885.34) -76.87,873.87 ccw(c-77.81,885.34) -66.3,885.34 ; -66.3,885.34 -55.97,875.01 U1.1@-55.97,871.78 ; 183.1,962.5 183.1,974.47 198.51,989.89 U1.15@239.31,989.89 ; 183.1,962.5 183.1,949.8 192.4,940.5 ; 192.4,940.5 200.4,932.5 ; 192.4,940.5 192.4,975.79 206.5,989.89 U1.15@239.31,989.89 ; 200.4,932.5 210,922.9 210,826.8 253.01,783.79 U4.8@266.4,783.79
  Top Layer w19.68: C31.2@-92.6,683.79 U4.3@-17.06,683.79 ; C31.2@-92.18,694.21 ccw(c-67.04,719.35) -67.04,683.79
  Top Layer w25: v1@-324.66,1124.34 cw(c-294.6,1094.28) C9.2@-294.6,1136.79 ; v1@-316.83,1146 cw(c-316.83,1119.57) C9.2@-298.13,1138.26 ; v1(175.1,734.6) 231.36,734.6 U4.7@232.17,733.79 ; U4.8@230.5,785.46 ccw(c244.04,799) U4.8@256.83,784.75 ; U4.7@232.17,727.66 cw(c303.08,727.66) U4.8@258.49,782.8 ; U4.7@238.46,740.44 ccw(c252.78,754.77) U4.7@257.39,735.04 ; 246.59,753.93 cw(c287.54,753.93) U4.8@258.59,782.89 ; 246.59,763.65 ccw(c287.54,763.65) U4.7@258.59,734.7 ; 246.59,765.6 cw(c264.88,765.6) U4.8@258.15,782.6 ; U4.7@258.39,734.86 cw(c290.94,783.79) U4.8@232.17,783.79 ; QL2.2@442.4,1115.79 442.4,1109.22 495,1056.62 495,967 v1(476,948) v1(476,926) ; QL2.2@447.4,1115.79 ccw(c475.35,1115.79) 455.59,1096.03 ; 491.56,963.56 ccw(c529.11,926) v1(476,926) ; 495,989 495,945 v1(476,926) ; v1(-327,1122) cw(c-298.81,1117.44) C9.2@-298.81,1146 ; v1(-327,1122) v1(-327,1146) C9.2@-298.8,1146 ; v1(-327,1122) -307.21,1141.79 C9.2@-294.6,1141.79 C9.2@-298.8,1146 ; U4.7@232.17,733.79 246.59,733.79 246.59,769.37 U4.8@232.17,783.79 ; U4.7@232.17,733.79 232.17,746.73 245.11,733.79 U4.7@232.17,733.79 ; U4.7@232.17,733.79 U4.8@232.17,783.79 ; U4.8@232.17,783.79 U4.8@266.4,783.79 ; U4.8@266.4,783.79 U4.7@266.4,733.79 U4.8@266.4,783.79 ; U4.7@247.49,734.7 ccw(c201.82,780.37) 266.4,780.37 cw(c201.82,780.37) U4.7@247.49,734.7 ; U4.8@247.49,782.89 cw(c201.82,737.22) 266.4,737.22 ccw(c201.82,737.22) U4.8@247.49,782.89
  Top Layer w27.56: C31.2@-97.6,688.79 -92.32,683.51 16.89,683.51 U4.3@17.17,683.79 ; C31.2@-94.97,691.42 ccw(c-75.87,710.52) -75.87,683.51 ; U4.3@-17.06,683.79 v1(68.31,683.79)
  Top Layer w35: U4.8@241.17,774.79 R3.2@330.4,774.79 ; U4.8@244.94,774.79 ccw(c244.94,796.54) U4.8@260.31,781.16 ; U4.8@245.76,781.16 ccw(c261.14,796.54) U4.8@261.14,774.79 ; U4.8@272.49,781.16 ccw(c287.87,796.54) 287.87,774.79 ; R3.2@313.5,774.79 cw(c313.5,750.89) R3.2@330.4,767.79
  Bottom Layer w10: v1@-332.3,1116.7 cw(c-345.11,1103.89) -327,1103.89 cw(c-308.89,1103.89) v1@-321.7,1116.7 ; v1@-332.3,1127.3 ccw(c-345.11,1140.11) -327,1140.11 ccw(c-308.89,1140.11) v1@-321.7,1127.3 ; v1@-332.3,1140.7 cw(c-345.11,1127.89) -327,1127.89 cw(c-308.89,1127.89) v1@-321.7,1140.7 ; -327,1082 -327,1094 v1(-327,1146) ; -91.1,873 v2@-76.2,858.1
  Bottom Layer w11.81: v1(-412,1079) -351,1079 ; -342,1079 -351,1079 ; -327,1082 -330,1079 -351,1079 ; -396.08,1079 cw(c-396.08,1094.92) -407.34,1083.66 ccw(c-396.08,1094.92) -396.08,1079 ; -396.08,1079 ccw(c-396.08,1063.08) -407.34,1074.34 cw(c-396.08,1063.08) -396.08,1079
  Bottom Layer w25: v1(-327,1146) -327,1070.32 -152.8,896.12 -106.52,896.12 v2(-76.2,865.8) ; v1@41.02,683.8 v1(44.4,683.8) ; v1@44.8,683.79 105.79,683.79 131.9,709.9 131.9,711.05 156.85,736 v1@196,736 ; 141.55,720.7 cw(c175.1,687.15) v1(175.1,734.6) ccw(c168.89,704.31) 147.02,726.17 ; v1@174.7,736 377,736 476,835 v1(476,948)
  other v1: 200,734.6 -412,1079
BT_RST: U1.14 U1.21 | length 912.1
  Top Layer w7: U1.14@239.31,970.2 274.18,970.2 283.4,960.98 283.4,902.94 317.65,868.7 v1(424.2,868.7) ; U1.21@239.31,1108 266.56,1108 312.56,1154 400,1154 414.4,1139.6 414.4,1093.94 455,1053.35 455,987 461,981 463,981 v1(462.8,981.2) ; U1.21@262.93,1110.4 ccw(c262.93,1124.97) 273.23,1114.67 ; v1@417.84,862.34 ccw(c402.47,846.97) 402.47,868.7 ccw(c402.47,890.43) v1@417.84,875.06 ; 455,1004.86 ccw(c486.46,1004.86) v1@464.21,982.61 ; 455,1021.76 ccw(c503.36,1021.76) v1@469.16,987.56
  Bottom Layer w7: v1(424.2,868.7) 449.73,894.23 449.73,968.13 v1(462.8,981.2) ; v1@424.2,877.7 ccw(c424.2,899.43) 439.56,884.06 ccw(c454.93,868.7) v1@433.2,868.7
BT_RX: U1.11
BT_TX: U1.10 U1.12 | length 136.5
  Top Layer w11.81: U1.10@121.2,871.78 121.2,902.32 133.09,914.21 148.68,914.21 160.57,902.32 U1.12@160.57,871.78 ; U1.10@121.2,895.4 cw(c137.9,895.4) 126.09,907.21 ; 155.68,907.21 cw(c143.87,895.4) U1.12@160.57,895.4
BT_VDD: C15.2 C21.1 U1.2 U1.16 | length 1202.7
  Top Layer w7: C21.1@330.4,961.79 v1(356.4,961.79) ; C21.1@342.09,954.09 cw(c356.4,944.65) v1(356.4,961.79) ; C21.1@342.09,969.5 ccw(c356.4,978.93) v1(356.4,961.79) ; v1@350.04,955.43 ccw(c334.67,940.07) 334.67,961.79 ccw(c334.67,983.52) v1@350.04,968.16
  Top Layer w9.84: C15.2@-173.6,800.79 -173.6,806.44 -66.81,913.23 -45.12,913.23 -36.28,904.38 U1.2@-36.28,871.78 ; C15.2@-173.6,813.37 ccw(c-173.6,830.11) C15.2@-161.76,818.27 ; C15.2@-161.02,800.79 cw(c-117.02,800.79) -148.13,831.9 ; v1@-158.6,827.37 ccw(c-158.6,841.69) -148.47,831.57 ; v1@-151.02,819.79 cw(c-128.75,819.79) -144.5,835.54
  Top Layer w11.81: 276.77,1009.57 U1.16@239.31,1009.57 285.37,1009.57 330.4,964.54 C21.1@330.4,961.79
  Bottom Layer w10: v1(-158.6,819.79) -127.39,819.79 -105.4,797.8 210.28,797.8 356.4,943.92 ; v1@-153.29,814.49 cw(c-140.49,801.69) -140.49,819.79 cw(c-140.49,837.9) v1@-153.29,825.1 ; v1@351.15,956.44 cw(c338.85,943.92) 356.4,943.92 ; v1(356.4,961.79) 356.4,943.92 ; v1@361.66,956.44 ccw(c373.95,943.92) 356.4,943.92
BT_WAKEUP: U1.9 U1.13 | length 359.2
  Top Layer w7: v1@95.15,912.15 cw(c79.78,896.78) 101.51,896.78 cw(c123.24,896.78) v1@107.88,912.15 ; U1.9@101.51,871.78 v1(101.51,918.51) ; v1@230.59,924.88 ccw(c215.22,940.24) 236.95,940.24 ccw(c258.68,940.24) v1@243.32,924.88 ; v1(236.95,918.51) U1.13@236.95,948.16 ; 236.95,939.02 cw(c250.8,939.02) U1.13@241.01,948.82
  Bottom Layer w7: v1(101.51,918.51) v1(236.95,918.51) ; v1@107.88,912.15 cw(c123.24,896.78) 123.24,918.51 cw(c123.24,940.24) v1@107.88,924.88 ; v1@230.59,912.15 ccw(c215.22,896.78) 215.22,918.51 ccw(c215.22,940.24) v1@230.59,924.88
CNR: C2.1 U1.42 | length 814.2
  Top Layer w11.81: C2.1@-303.1,1077.29 ccw(c-282.19,1098.2) C2.1@-282.19,1068.63 ; -276.76,1090 cw(c-276.76,1103.63) C2.1@-286.4,1093.99 ; -273.89,1077 cw(c-273.89,1106.5) -294.75,1085.64 ccw(c-253.68,1126.71) -253.68,1068.63 ; -256.45,1090 ccw(c-256.45,1047.64) -286.4,1077.59 cw(c-266.61,1057.8) -266.61,1085.79 cw(c-266.61,1113.78) C2.1@-286.4,1093.99 ; -245.38,1077 cw(c-245.38,1135.01) C2.1@-286.4,1093.99 ; -225.17,1068.63 cw(c-225.17,1155.22) C2.1@-286.4,1093.99 ; C2.1@-294.6,1085.79 -237.6,1085.79 -220.43,1068.63 ; C2.1@-294.6,1085.79 -277.43,1068.63 -220.43,1068.63 ; C2.1@-294.6,1085.79 -282.79,1085.79 -276,1079 -276,1077 -244.37,1077 -236,1068.63 -201,1068.63 ; C2.1@-294.6,1085.79 -290.39,1090 -229.37,1090 -208,1068.63 U1.42@-134.71,1068.63 -201,1068.63 ; -220.43,1068.63 -201,1068.63
DACL: C36.1 U1.47 | length 402.1
  Top Layer w11.81: C36.1@-294.6,798.79 -268.61,798.79 ; C36.1@-285.97,791.05 cw(c-268.61,775.46) -268.61,798.79 ; C36.1@-285.97,806.54 ccw(c-268.61,822.12) -268.61,798.79 ; U1.47@-134.71,970.2 -101.01,970.2 -91.6,960.79 -91.6,943.4 -126.5,908.5 -158.9,908.5 -268.61,798.79 ; -95.97,965.16 ccw(c-108.57,952.57) -111.09,970.2 cw(c-111.09,945.87) -93.88,963.08
DVDD: C23.1 S2.3 U1.18 | length 2513.7
  Top Layer w7: -721.93,1337.57 cw(c-696,1311.65) S2.3@-675.23,1341.86 ; -715.98,1343.52 cw(c-691.15,1318.7) S2.3@-671.26,1347.62 ; -710.03,1349.47 cw(c-686.3,1325.75) S2.3@-667.29,1353.39 ; -704.08,1355.42 cw(c-681.46,1332.8) S2.3@-663.32,1359.16 ; -702.54,1354.93 cw(c-702.54,1322.25) S2.3@-679.43,1345.36 ; S2.3@-696.77,1354.93 ccw(c-696.77,1370.72) S2.3@-681.08,1369.02 ; S2.3@-688.03,1369.77 cw(c-704.57,1371.56) -704.57,1354.93 ; S2.3@-635.44,1354.93 -704.57,1354.93 ; v1@-443.96,1043.24 ccw(c-459.33,1027.87) -459.33,1049.6 ccw(c-459.33,1071.33) v1@-443.96,1055.96 ; v1(-437.6,1049.6) -556.1,1049.6 -614.8,1108.3 -747.4,1108.3 -803.12,1164.02 -803.12,1256.38 -704.57,1354.93 ; U1.18@239.31,1048.94 321.4,1048.94
  Top Layer w11.81: v1(188.3,1057.1) 196.46,1048.94 U1.18@239.31,1048.94 375.25,1048.94 C23.1@406.4,1017.79 ; C23.1@394.81,1017.79 ccw(c366.82,1017.79) 386.61,1037.59 ccw(c406.4,1057.38) C23.1@406.4,1029.39
  Bottom Layer w7: v1(-437.6,1049.6) -345.3,1049.6 -168.82,873.12 -118.17,873.12 -86.35,841.3 192.27,841.3 293.7,942.73 293.7,1046.94 283.54,1057.1 v1(188.3,1057.1) ; v1@-431.24,1043.24 cw(c-415.87,1027.87) -415.87,1049.6 cw(c-415.87,1071.33) v1@-431.24,1055.96 ; v1@194.66,1050.74 cw(c210.03,1035.37) 210.03,1057.1 cw(c210.03,1078.83) v1@194.66,1063.46
FM_IIC_CLK: pad.0@431,1344 QU1.3 U1.31 | length 963.3
  Top Layer w7: U1.31@42.46,1245.79 42.46,1280.64 158.92,1397.1 261.86,1397.1 301.95,1437.19 386.81,1437.19 v1(448,1376) ; v1@439,1376 ccw(c417.27,1376) 432.64,1391.36 ccw(c448,1406.73) v1@448,1385 ; v1(497.7,1361.5) 543.21,1361.5 QU1.3@548.4,1366.69 ; v1@500.17,1361.5 ccw(c500.17,1394.92) QU1.3@523.81,1371.29 ; v1@504.06,1355.14 cw(c519.43,1339.77) 519.43,1361.5 cw(c519.43,1383.23) v1@504.06,1367.86 ; 517.07,1361.5 ccw(c517.07,1378.02) QU1.3@528.76,1366.34
  Top Layer w20: v1(497.7,1361.5) 502.89,1366.69 QU1.3@548.4,1366.69 ; v1@499.47,1359.73 cw(c516.27,1342.93) 516.27,1366.69
  Bottom Layer w7: v1(448,1376) 483.2,1376 v1(497.7,1361.5) ; v1@454.36,1369.64 cw(c469.73,1354.27) 469.73,1376 cw(c469.73,1397.73) v1@454.36,1382.36
  Bottom Layer w25: pad.0@431,1339.77 cw(c478.11,1339.77) v1(448,1376) ; pad.0@431,1344 431,1359 v1(448,1376) ; pad.0@441.5,1347.66 cw(c467.35,1356.65) v1(448,1376)
FM_IIC_DAT: J3.7 QU1.4 U1.22 | length 2602.9
  Top Layer w7: J3.7@147.79,462.39 200.39,409.79 594.27,409.79 732.4,547.92 732.4,706.73 674.13,765 v1(665,765) ; J3.7@156.02,436.44 cw(c156.02,393.66) 186.27,423.91 ; J3.7@156.02,443.44 cw(c156.02,417.56) 174.32,435.86 ; U1.22@239.31,1127.68 266.45,1127.68 292.6,1153.84 292.6,1379.8 306.4,1393.6 381.4,1393.6 422,1353 457.53,1353 471,1366.47 471,1385 485,1399 ; U1.22@262.93,1130.09 ccw(c262.93,1144.38) 273.04,1134.28 ; v1@494.56,1393.94 ccw(c485,1387.45) 485,1399 ; v1@494.56,1404.06 cw(c485,1410.55) 485,1399 ; v1@509.47,1404.03 cw(c517.77,1409.61) 510.69,1416.69 ; QU1.4@524.22,1410.86 ccw(c510.69,1398.09) 510.69,1416.69 ; QU1.4@524.22,1422.53 cw(c510.69,1435.29) 510.69,1416.69 ; QU1.4@525.99,1416.69 QU1.4@548.4,1416.69 510.69,1416.69 ; v1@665,756 cw(c665,712.24) 695.94,743.18 ; v1@665,763 cw(c665,736.14) 683.99,755.13 ; 485,1399 v1(502,1399) 502,1408 510.69,1416.69
  Top Layer w20: v1(502,1399) 504.31,1399 522,1416.69 QU1.4@548.4,1416.69 ; 512.64,1407.34 cw(c530.4,1389.58) QU1.4@530.4,1414.69
  Bottom Layer w7: v1(502,1399) 603.2,1399 656.4,1345.8 656.4,773.6 v1(665,765) ; v1@508.36,1392.64 cw(c523.73,1377.27) 523.73,1399 cw(c523.73,1420.73) v1@508.36,1405.36
FM_VDD: QC3.1 QL2.1 QU1.6 | length 1025.3
  Top Layer w11.81: QL2.1@442.4,1183.79 498.4,1127.79 QC3.1@498.4,1107.79 ; QL2.1@454,1191.79 ccw(c501.3,1191.79) 467.85,1158.34 ; 470.12,1156.07 cw(c429.85,1115.79) QC3.1@486.81,1115.79 ; 490.29,1135.91 cw(c470.17,1115.79) QC3.1@498.62,1115.79
  Top Layer w20: QU1.6@333.4,1366.69 371.21,1366.69 409.6,1328.3 409.6,1227.64 442.4,1194.83 QL2.1@442.4,1191.79 ; 380.11,1357.79 ccw(c357.85,1335.54) 353.4,1366.69 cw(c353.4,1323.71) 383.8,1354.1 ; 427.45,1209.79 cw(c409.45,1191.79) QL2.1@434.9,1191.79 ; QL2.1@449.02,1188.26 ccw(c469.79,1177.19) 453.15,1160.55 ; QL2.1@449.9,1191.79 ccw(c487.32,1191.79) 460.86,1165.33 ; 477.11,1149.08 cw(c443.82,1115.79) QC3.1@490.9,1115.79 ; QC3.1@498.4,1123.29 cw(c498.4,1141.4) 485.6,1128.6 cw(c472.8,1115.79) QC3.1@490.9,1115.79 ; 442.4,1173.69 cw(c460.51,1173.69) 447.71,1186.49 ccw(c460.51,1173.69) 442.4,1173.69 ; 442.4,1173.69 ccw(c424.3,1173.69) 437.1,1186.49 cw(c424.3,1173.69) 442.4,1173.69 ; QL2.1@442.4,1191.79 442.4,1171.29 463.4,1150.29 ; QL2.1@442.4,1191.79 442.4,1183.79 498.4,1127.79 QC3.1@498.4,1115.79 ; 463.4,1150.29 466.94,1150.29 ; 463.4,1150.29 466.94,1150.29 ; 463.4,1150.29 466.94,1150.29 ; 466.94,1150.29 498.4,1118.83 QC3.1@498.4,1115.79 ; 466.94,1150.29 476.9,1140.33 476.9,1137.29 QC3.1@498.4,1115.79 ; 483.45,1133.79 cw(c465.45,1115.79) QC3.1@490.9,1115.79 ; 483.45,1133.79 cw(c465.45,1115.79) QC3.1@490.9,1115.79 ; 483.45,1133.79 cw(c465.45,1115.79) QC3.1@490.9,1115.79
FM_VOUT: C36.2 QC2.1 QC4.1 R25.2 | length 1381.7
  Top Layer w15: C36.2@-370.6,788.79 cw(c-370.6,764.65) -353.53,781.72 cw(c-336.46,798.79) C36.2@-360.6,798.79 ; C36.2@-370.6,798.79 -314.6,742.79 ; -345.81,774.01 ccw(c-294.6,825.22) -294.6,752.79 ccw(c-294.6,818.92) -247.84,772.16 ; -320.2,748.4 ccw(c-294.6,774.01) -294.6,737.79 ccw(c-294.6,767.71) -273.45,746.55 ; R25.2@-302.6,736.79 ccw(c-314.6,727.79) -314.6,742.79 ; R25.2@-302.6,748.79 cw(c-314.6,757.79) -314.6,742.79 ; -243.83,776.17 cw(c-232.9,765.25) v1@-232.9,780.7 ; v1(-232.9,785.7) -234.3,785.7 -277.21,742.79 R25.2@-294.6,742.79 -314.6,742.79
  Top Layer w35: QC2.1@330.4,1115.79 v1(358.4,1115.79) QC4.1@386.4,1115.79
  Bottom Layer w7: v1(-232.9,785.7) -233.1,785.9 -233.1,786.9 -177.21,842.79 -128.47,842.79 -98.98,813.3 203.86,813.3 323,932.44 323,1080.39 v1(358.4,1115.79) ; v1@-232.9,794.7 ccw(c-232.9,813.05) -219.93,800.07 ; v1@-223.9,785.7 cw(c-198.79,785.7) -216.55,803.45 ; v1@349.4,1115.79 cw(c327.67,1115.79) 343.04,1100.43 cw(c358.4,1085.06) v1@358.4,1106.79
FMCLK: QR18.1 QU1.5 | length 138
  Top Layer w7: QR18.1@262.1,1366.4 262.1,1373.4 305.39,1416.69 QU1.5@333.4,1416.69 ; 288.63,1399.93 cw(c313.4,1375.16) QU1.5@313.4,1410.19 ; 300.58,1411.88 cw(c313.4,1399.06) QU1.5@313.4,1417.19